# Altium PCB PCBMain.PcbDoc
Units mm, origin at the board's own origin, x right, y up, seen from the top; angles counter-clockwise.
Board outline 85.47 x 80.01 mm, 2 copper layers (Top Layer, Bottom Layer); 11 components, 9 nets, 69 pads, 0 vias.
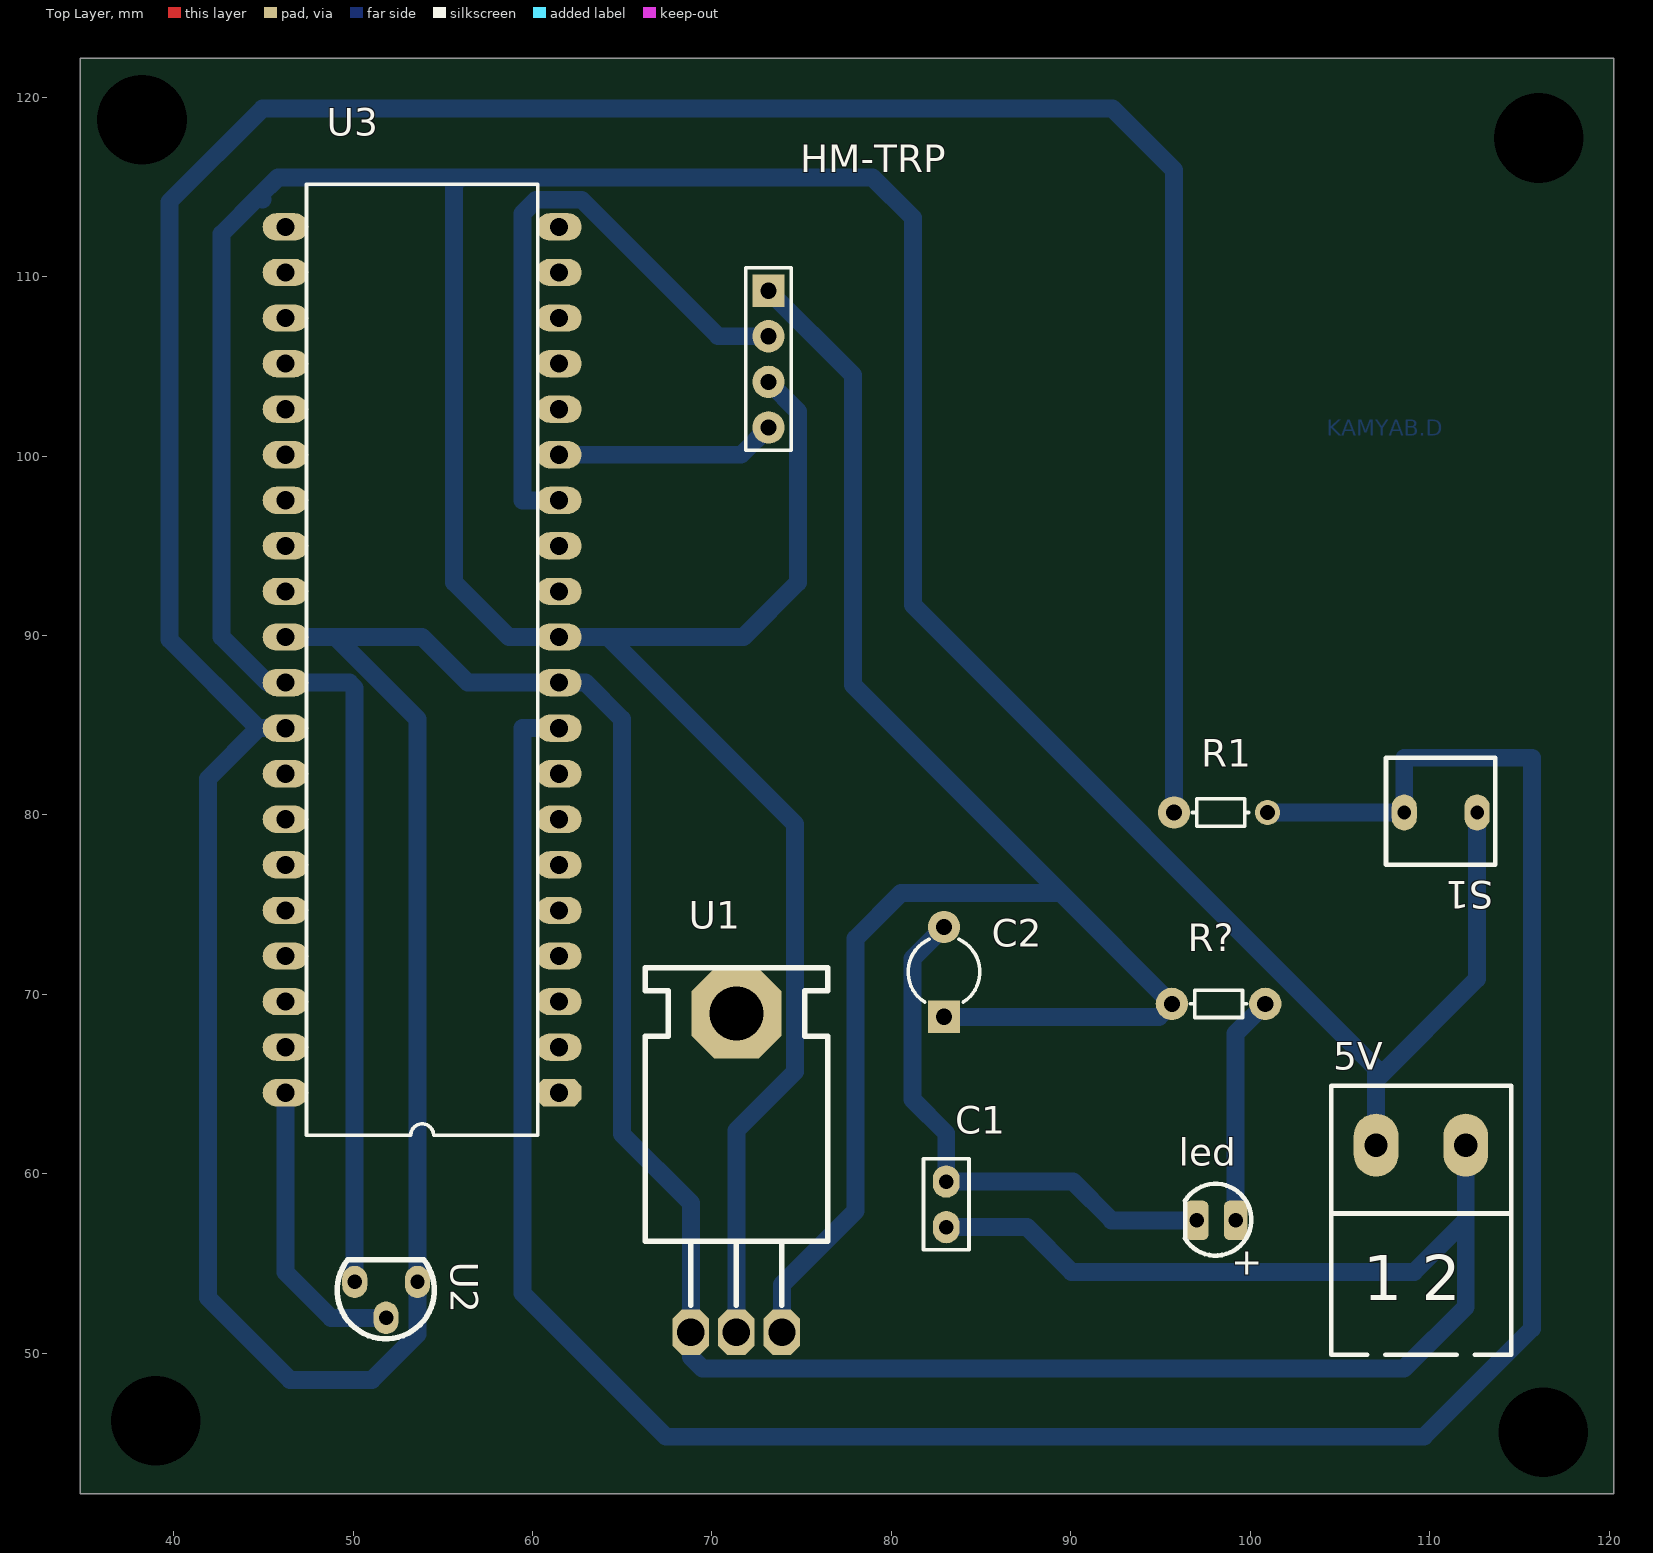
[diagram p0: Top Layer view]
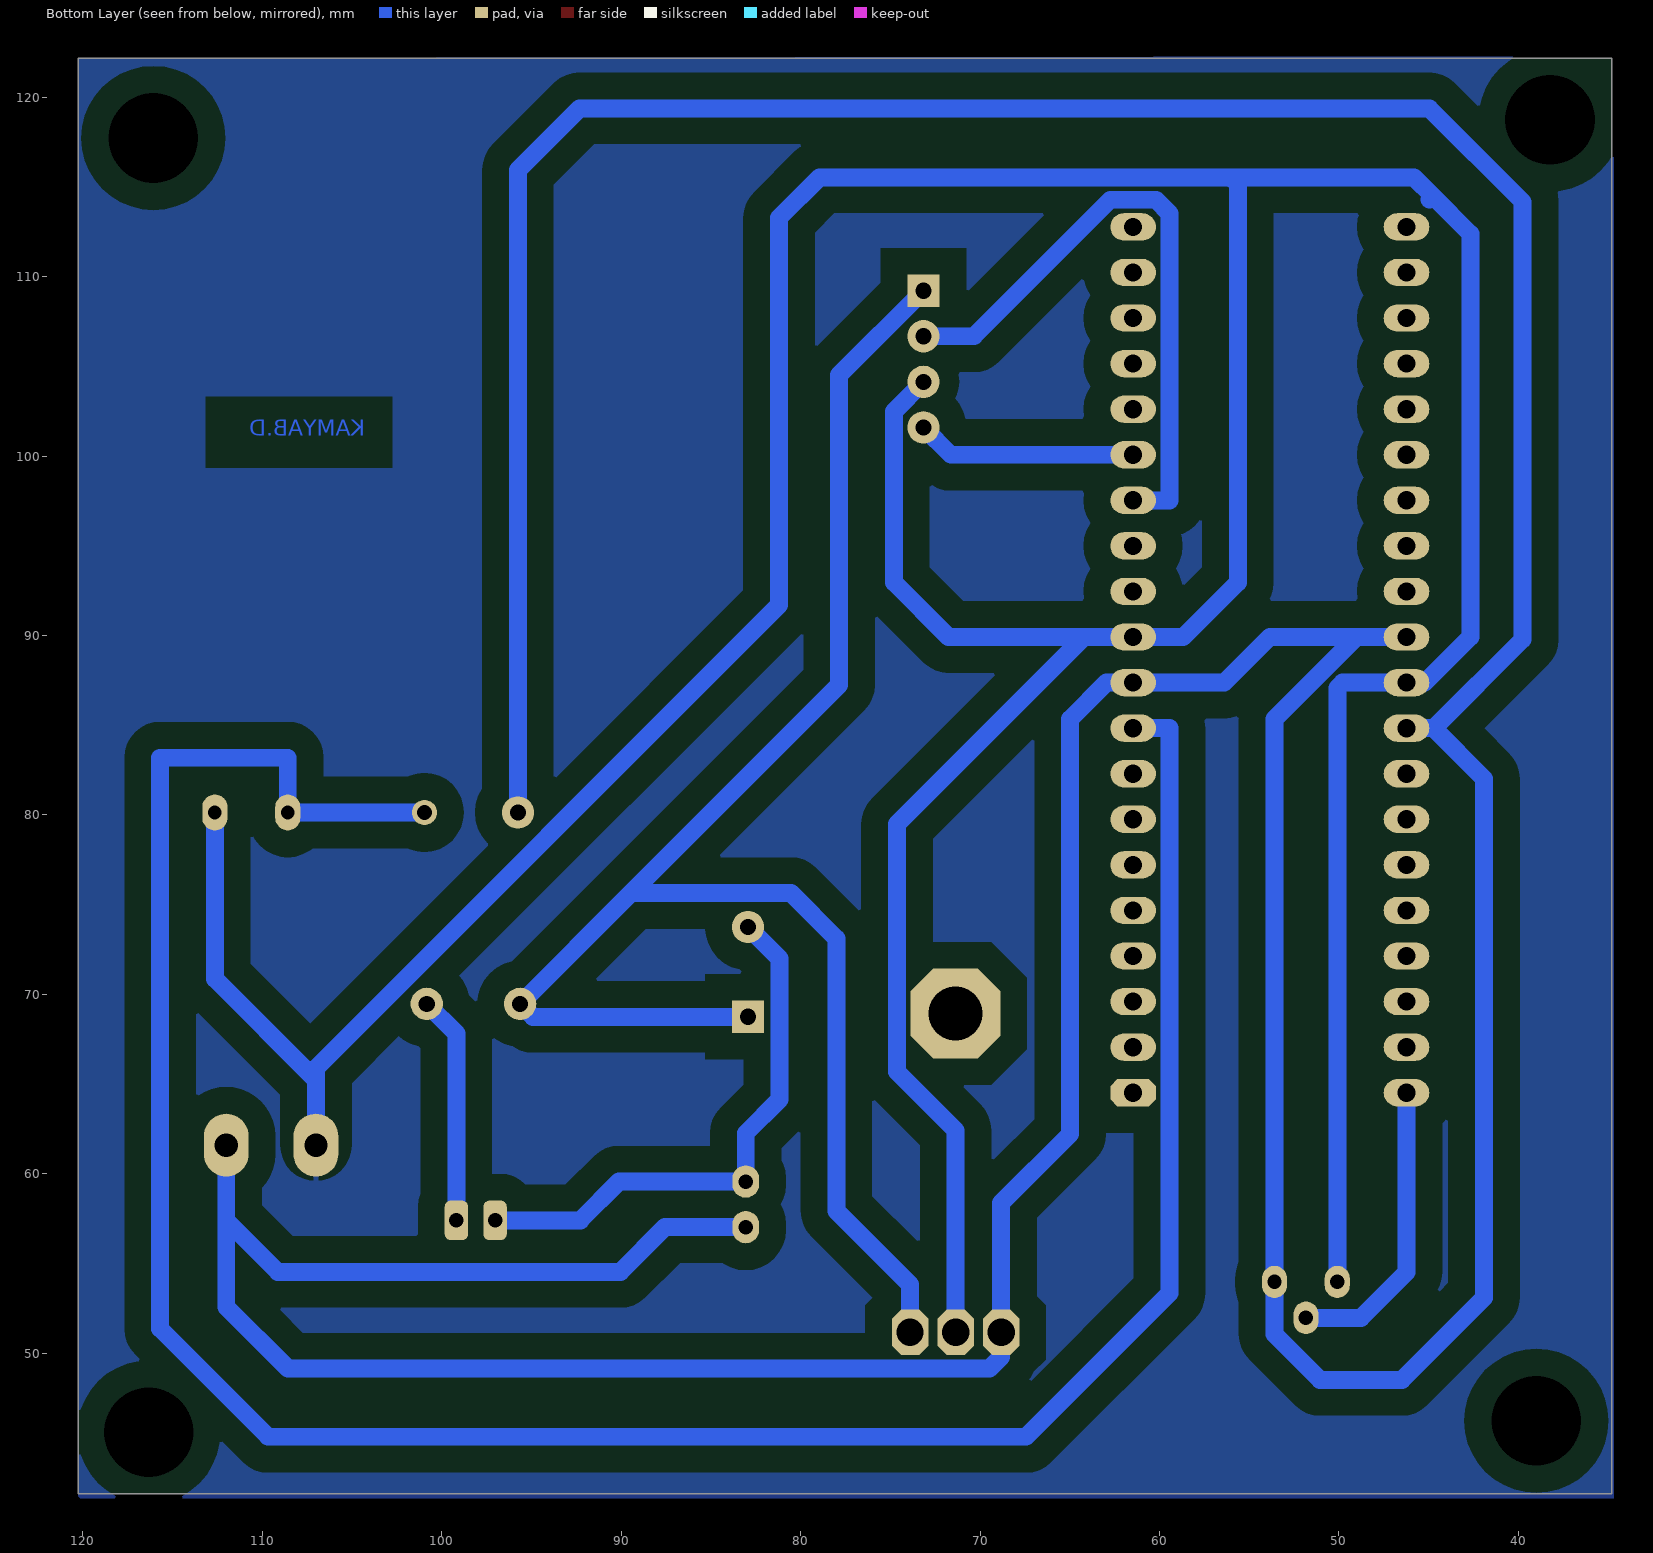
[diagram p1: Bottom Layer view, seen from below]

## Layer stack, top to bottom
Top Solder: solder mask 0.0102, Solder Resist, Dk 3.5
Top Layer: signal copper 0.0356
Dielectric 1: dielectric 0.32, FR-4, Dk 4.8
Bottom Layer: signal copper 0.0356
Bottom Solder: solder mask 0.0102, Solder Resist, Dk 3.5

## Board outline
34.798,42.164 120.269,42.164 120.269,122.174 34.798,122.174

## Design rules (kind name [scope] priority, off if disabled: settings)
Clearance pol [InPolygon] p1: gap=1.5
Clearance HM-TRP [All] p2: gap=0.25
Clearance [All] p3: gap=0.5
PolygonConnect [All] p1: connectstyle=Relief reliefconductorwidth=0.254 reliefentries=4 polygonreliefangle="90 Angle" airgapwidth=0.254
RoutingVias [All] p1: holewidth=0.711 width=1.27 viastyle="Through Hole" minholewidth=0.711 minwidth=1.27 maxholewidth=0.711 maxwidth=1.27
SolderMaskExpansion [All] p1: expansion=0.102
Width [All] p1: maxlimit=1 minlimit=1 preferedwidth=1
30 further rules are at their usual default settings.

## Components (designator, comment, footprint, x,y, rotation, side; value= is the part's Value field where it differs from the comment)
5V "Phoenix terminal" "phoenix terminal 2" 104.521,49.911 r0 top
C1 "Cap" RAD-0.1 83.058,58.293 r270 top
C2 "Cap2" CAPR5-4X5 82.931,71.247 r90 top
HM-TRP "Header 4" HDR1X4 73.152,109.22 r270 top (schematic designator IC?)
led "LED 3mm" LED-3mm 98.171,57.531 r270 top
R1 "Resistor vertical" Res50#1 97.155,80.137 r180 top
R? "Resistor vertical" Res50#2 97.028,69.469 r180 top
S1 "PB-2pin" PB-2pin 113.665,83.185 r180 top
U1 "7805" My_TO-220 68.834,51.168 r0 top
U2 "LM35" LM35-TO92 53.086,53.721 r270 top
U3 "ATmega16-16PI" My_40P6 53.848,88.646 r90 top

## Footprints (in the part's own frame and the unit in brackets; to place one, negate y for a bottom-side part, rotate by r counter-clockwise, add the part's x,y. Pads: shape width x height; smd on the part's side, far side on the other; paste and mask are expansions set on the pad)
CAPR5-4X5 [mm] "Capacitor; 2 Leads"
  rect 1.8x1.8 hole 0.9: 1(-2.5,0)
  round 1.8 hole 0.9: 2(2.5,0)
  silkscreen extent -1.69,-2 1.82,2
HDR1X4 [mm] "Connector; Header; 4 Position"
  rect 1.8x1.8 hole 0.9: 1(0,0)
  round 1.8 hole 0.9: 2(2.54,0) 3(5.08,0) 4(7.62,0)
  silkscreen extent -1.27,-1.27 8.89,1.27
LED-3mm [mm] "LED; 2 Leads"
  rrect50% 2.2x1.3 hole 0.8: 1(0.127,1.016) 2(0.127,-1.143)
  silkscreen extent -1.9,-1.81 2.09,1.89
LM35-TO92 [mm]
  oval 1.8x1.4 hole 0.8: 1(-0.25,0.5) 2(1.75,-1.25) 3(-0.25,-3)
  silkscreen extent -1.49,-3.98 2.92,1.44
My_40P6 [mil]
  oct 60x100 hole 40: 1(-950,-300)
  oval 60x100 hole 40: 2(-850,-300) 3(-750,-300) 4(-650,-300) 5(-550,-300) 6(-450,-300) 7(-350,-300) 8(-250,-300) 9(-150,-300) 10(-50,-300) 11(50,-300) 12(150,-300) 13(250,-300) 14(350,-300) 15(450,-300) 16(550,-300) 17(650,-300) 18(750,-300) 19(850,-300) 20(950,-300) 21(950,300) 22(850,300) 23(750,300) 24(650,300) 25(550,300) 26(450,300) 27(350,300) 28(250,300) 29(150,300) 30(50,300) 31(-50,300) 32(-150,300) 33(-250,300) 34(-350,300) 35(-450,300) 36(-550,300) 37(-650,300) 38(-750,300) 39(-850,300) 40(-950,300)
  silkscreen extent -1043,-254 1043,254
My_TO-220 [mil]
  oct 196.85x196.85 hole 118.11: 0(99.49,699.49)
  oct 80x100 hole 60: 1(-0.5,-0.5) 2(99.5,-0.5) 3(199.5,-0.5)
  silkscreen extent -100,60 300,800
PB-2pin [mil] "Switch"
  oval 55.12x78.74 hole 30: 1(40,120) 2(200,120)
  silkscreen extent 0,0 240,235
"phoenix terminal 2" [mm] "2 terminals"
  oval 2.5x3.5 hole 1.3: 1(2.493,11.684) 2(7.493,11.684)
  silkscreen extent 0,0 10.03,15
RAD-0.1 [mm] "Radial Cap, Thru-Hole; 2 Leads; 0.1 in Pin Spacing"
  oval 1.8x1.5 hole 0.8: 1(-1.27,0) 2(1.27,0)
  silkscreen extent -2.54,-1.27 2.54,1.27
Res50#1 [mm] "50mm Pin Spacing"
  round 1.4 hole 0.85: 1(-3.81,0)
  round 1.8 hole 0.9: 2(1.397,0)
  silkscreen extent -2.77,-0.76 0.38,0.76
Res50#2 [mm] "50mm Pin Spacing"
  round 1.8 hole 0.9: 1(-3.81,0) 2(1.397,0)
  silkscreen extent -2.77,-0.76 0.38,0.76

## Part data
5V: library part "Phoenix terminal 2", "Terminal 2 Pin"
C1 C2: "Capacitor"
HM-TRP: "Header, 4-Pin"
led: "Typical LED"
R1 R?: "Resistor 0.5"
S1: "Switch"
U1: "Regulator"
U2: "LM35 Temperature Sensor"
U3: "AVR 16K Bytes of In-System Programmable Flash Memory"

## Free pads (board coordinates)
  round 0 hole 5: ""(38.227,118.745) ""(38.989,46.228) ""(116.078,117.729) ""(116.332,45.593)

## Nets (pads, with @x,y where several pads share a name; then routed paths per layer and width w, separated by ;. In a path a pad name is that pad's centre, name@x,y a point inside that pad or via, vN(x,y) a via of type N, cw(c..) or ccw(c..) an arc to the next point about the centre after c; other vN are vias at no path point)
3.3V: C2.1 HM-TRP.1 R?.2 U1.3 | length 98.2
  Bottom Layer w1: HM-TRP.1 77.851,104.521 77.851,87.249 89.459,75.641 ; U1.3 73.901,53.823 78.003,57.925 78.003,73.101 80.543,75.641 89.459,75.641 ; C2.1 94.909,68.747 R?.2 89.459,75.641
GND: 5V.1 HM-TRP.3 S1.1 U1.2 U2.3 U3.11 U3.31 | length 285.5
  Bottom Layer w1: 44.958,114.3 44.767,114.49 ; U2.3 50.086,87.074 49.784,87.376 U3.31 45.212,87.376 42.672,89.916 42.672,112.395 44.767,114.49 ; U1.2 71.361,62.42 74.625,65.684 74.625,79.502 64.211,89.916 ; HM-TRP.3 74.802,102.49 74.802,92.964 71.754,89.916 64.211,89.916 ; 5V.1 107.014,65.231 ; S1.1 112.649,70.866 107.014,65.231 ; 44.767,114.49 45.815,115.538 56.007,115.538 ; 56.007,115.538 55.626,115.157 55.626,92.964 58.674,89.916 U3.11 64.211,89.916 ; 56.007,115.538 78.95,115.538 81.204,113.284 81.204,91.694 107.014,65.884 107.014,65.231
NetC1_1: C1.1 C2.2 led.2 | length 30.6
  Bottom Layer w1: C2.2 81.178,71.994 81.178,64.135 83.058,62.255 C1.1 90.119,59.563 92.278,57.404 led.2
NetHM-TRP_2: HM-TRP.2 U3.14 | length 35.2
  Bottom Layer w1: U3.14 59.436,97.536 59.436,113.526 60.198,114.288 62.738,114.288 70.346,106.68 HM-TRP.2
NetHM-TRP_4: HM-TRP.4 U3.15 | length 12.3
  Bottom Layer w1: U3.15 71.628,100.076 HM-TRP.4
Netled_1: led.1 R?.1 | length 12.7
  Bottom Layer w1: led.1 99.187,67.818 R?.1
NetR1_1: R1.1 S1.2 U3.9 | length 145.2
  Bottom Layer w1: U3.9 59.436,84.836 59.436,53.34 67.437,45.339 109.677,45.339 115.697,51.359 115.697,83.185 108.585,83.185 S1.2 R1.1
NetU2_2: U2.2 U3.40 | length 16.7
  Bottom Layer w1: U3.40 46.228,54.508 48.768,51.968 51.836,51.968 U2.2
VCC: 5V.2 C1.2 R1.2 U1.1 U2.1 U3.10 U3.30 U3.32 | length 359.5
  Bottom Layer w1: U3.32 44.729,84.836 ; U3.30 49.014,89.916 ; C1.2 87.554,57.023 90.043,54.534 109.144,54.534 112.014,57.404 ; R1.2 95.758,115.951 92.329,119.38 44.958,119.38 39.751,114.173 39.751,89.789 44.704,84.836 44.729,84.836 ; 5V.2 112.014,57.404 ; 44.729,84.836 41.91,82.017 41.91,53.086 46.482,48.514 51.046,48.514 53.586,51.054 U2.1 53.586,85.344 49.014,89.916 ; 49.014,89.916 53.848,89.916 56.388,87.376 U3.10 62.941,87.376 64.973,85.344 64.973,62.217 68.821,58.369 U1.1 68.821,49.784 69.47,49.136 108.572,49.136 112.014,52.578 112.014,57.404
pads on no net: U1.0 U3.1 U3.2 U3.3 U3.4 U3.5 U3.6 U3.7 U3.8 U3.12 U3.13 U3.16 U3.17 U3.18 U3.19 U3.20 U3.21 U3.22 U3.23 U3.24 U3.25 U3.26 U3.27 U3.28 U3.29 U3.33 U3.34 U3.35 U3.36 U3.37 U3.38 U3.39

## Polygon pours and split planes (outlines as drawn)
GND on Bottom Layer "Bottom Layer-No Net" (solid, pour order 12): 120.269,122.174 120.269,42.037 120.142,41.91 34.671,41.91 34.671,122.174 34.798,122.301

## Other copper
Bottom Layer:
  text "KAMYAB.D" at 104.267,100.838 h1.52

## Text inside footprints (layer, text, board x,y; h text height)
5V: Top Overlay "1 2" at 106.299,52.959 h2.5
led: Top Overlay "+" at 98.933,54.356 h1.52